# Altium PCB Interface_PCB.PcbDoc
Units mm, origin at the board's own origin, x right, y up, seen from the top; angles counter-clockwise.
Board outline 101.2 x 41.85 mm, 4 copper layers (Top Layer, Middle Layer 1, Middle Layer 2, Bottom Layer), stack 1.65 mm thick; 79 components, 48 nets, 304 pads, 9 vias.
Unrouted connection lines stored in the file: 76.
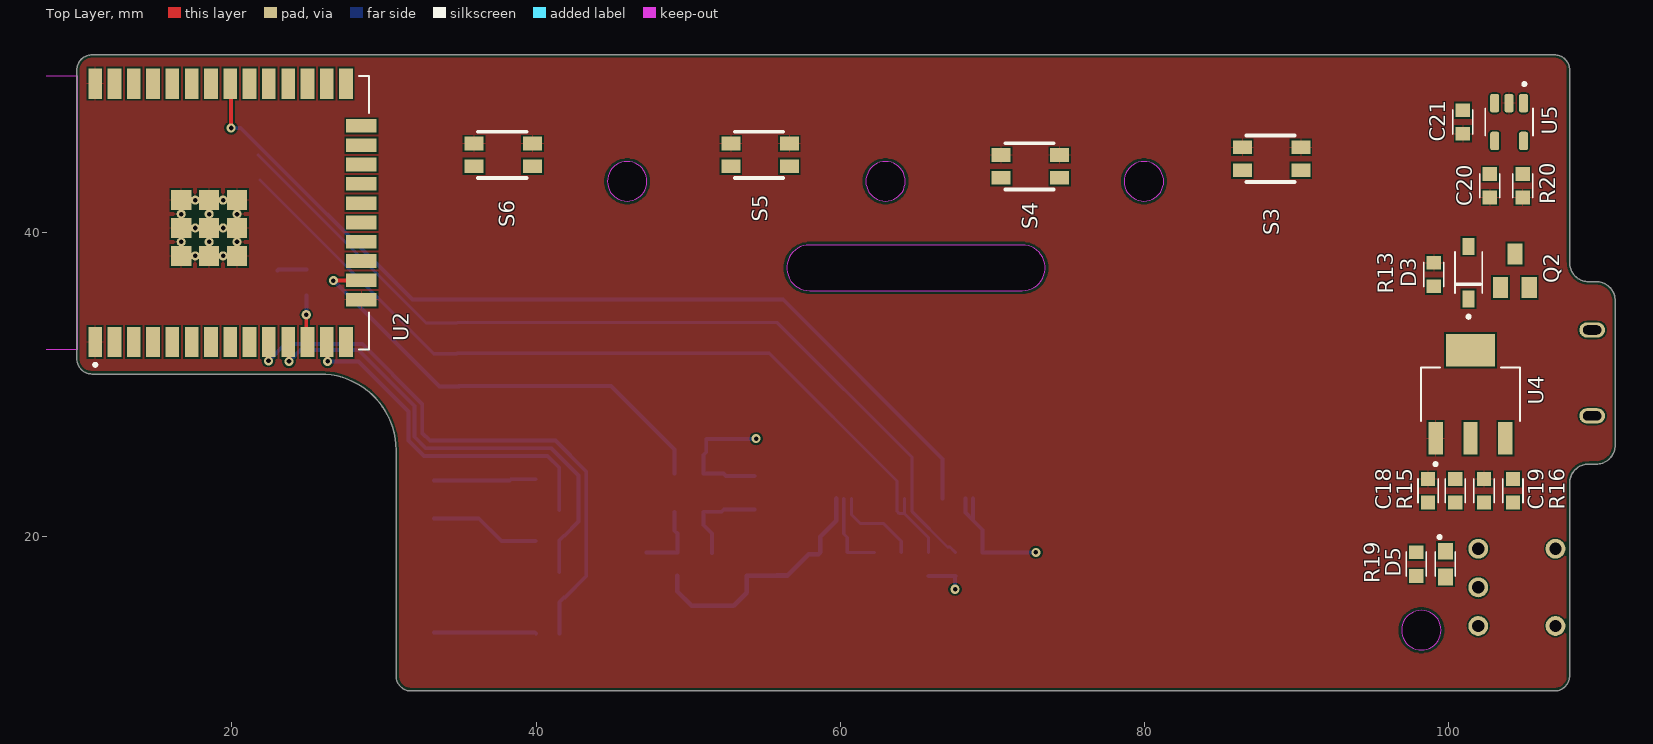
[diagram p0: Top Layer view]
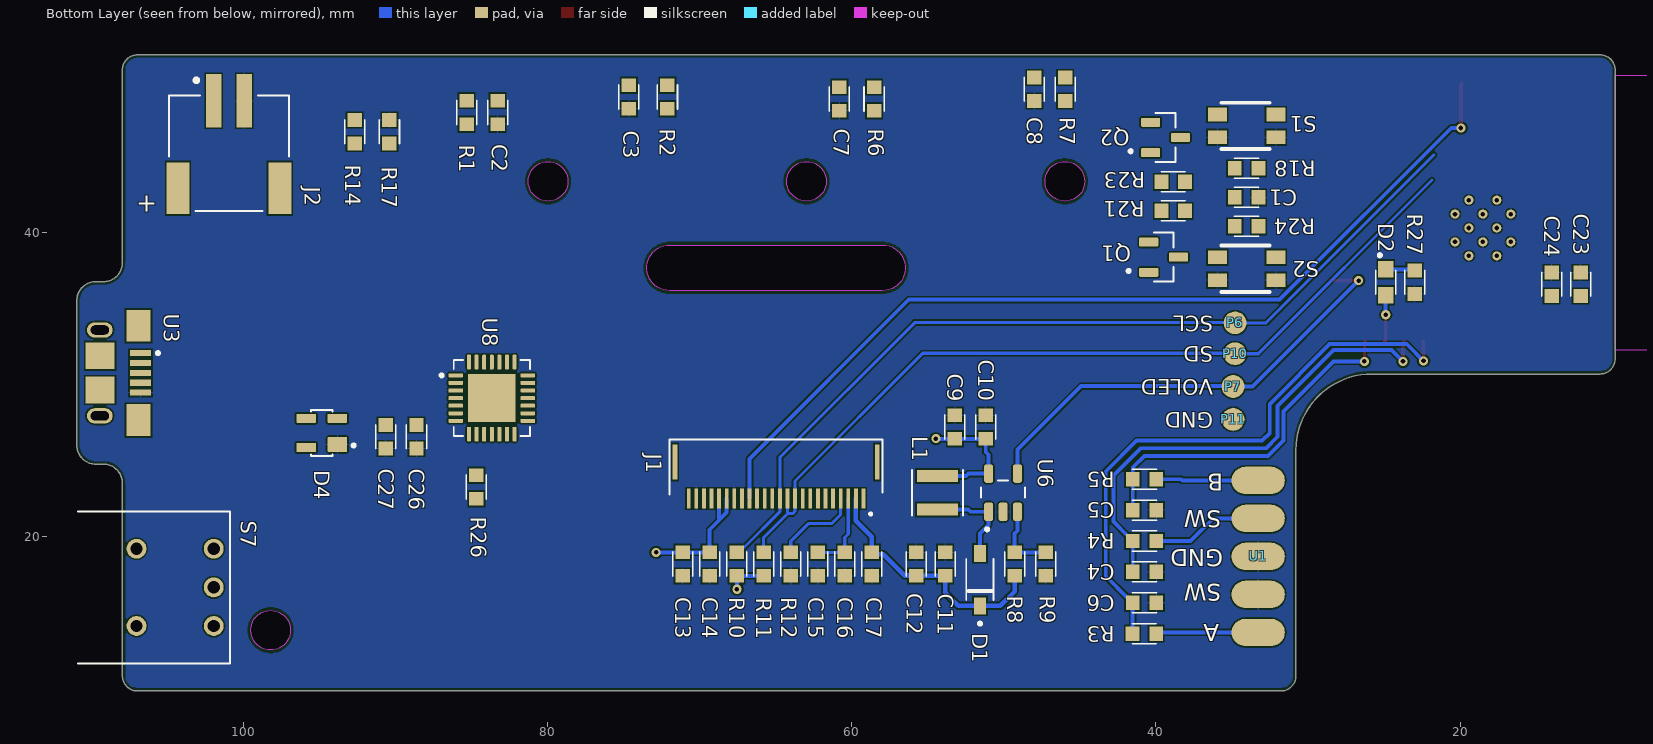
[diagram p1: Bottom Layer view, seen from below]
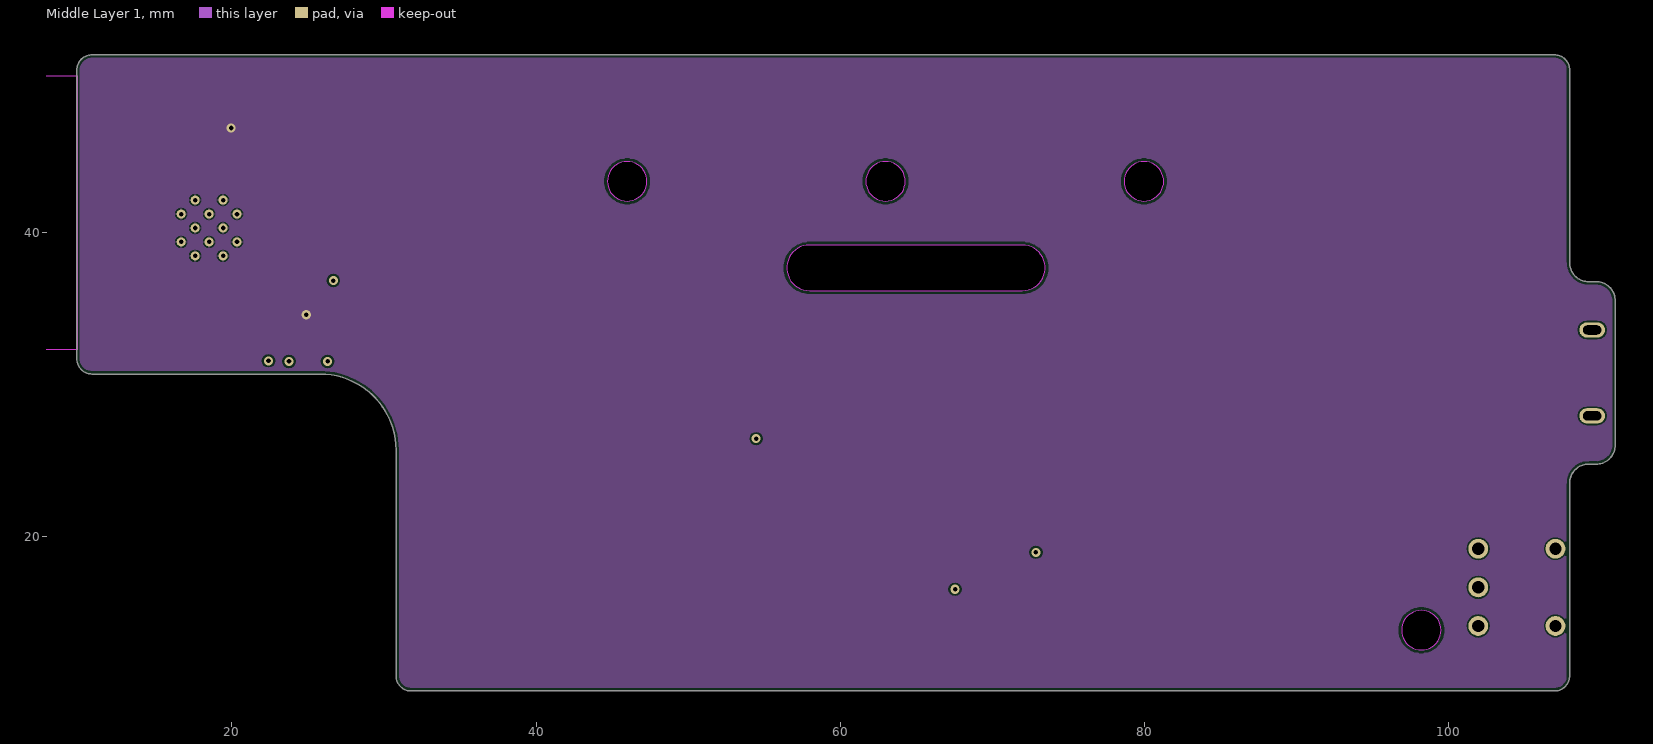
[diagram p2: Middle Layer 1]
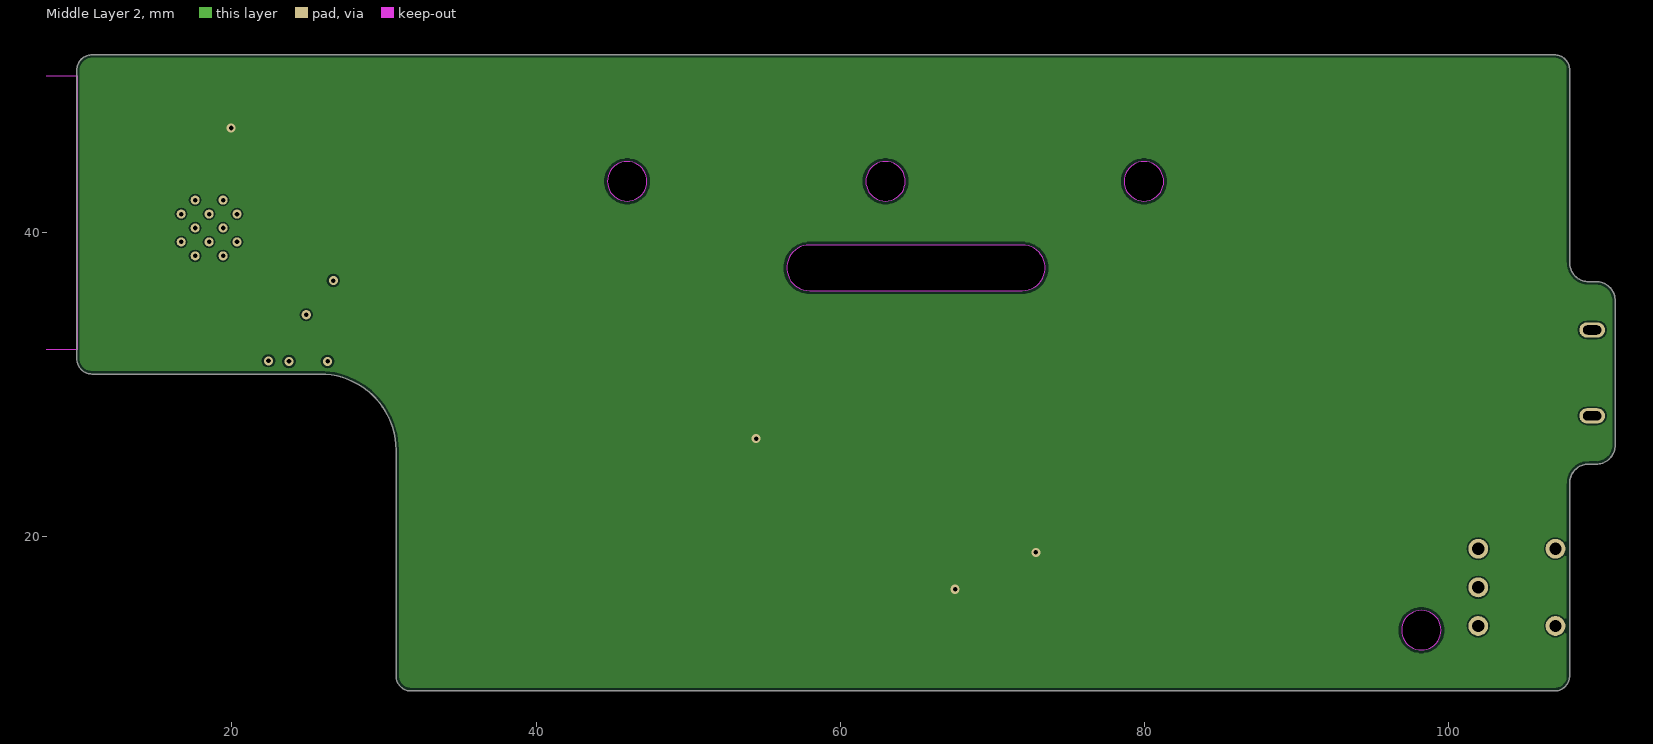
[diagram p3: Middle Layer 2]

## Layer stack, top to bottom
Top Solder: solder mask 0.0102, Solder Resist, Dk 3.5
Top Layer: signal copper 0.035
Dielectric 2: prepreg 0.1702, FR-4, Dk 4.5
Middle Layer 1: signal copper 0.0178
Dielectric 1: dielectric 1.2038, FR-4, Dk 4.8
Middle Layer 2: signal copper 0.0178
Dielectric 3: prepreg 0.1702, FR-4, Dk 4.5
Bottom Layer: signal copper 0.035
Bottom Solder: solder mask 0.0102, Solder Resist, Dk 3.5

## Board outline
25.792,30.667 cw(c25.792,25.667) 30.792,25.667 30.792,10.817 ccw(c31.792,10.817) 31.792,9.817 106.992,9.817 ccw(c106.992,10.817) 107.992,10.817 107.992,23.492 cw(c109.242,23.492) 109.242,24.742 109.742,24.742 ccw(c109.742,25.992) 110.992,25.992 110.992,35.492 ccw(c109.742,35.492) 109.742,36.742 109.242,36.742 cw(c109.242,37.992) 107.992,37.992 107.992,50.667 ccw(c106.992,50.667) 106.992,51.667 10.792,51.667 ccw(c10.792,50.667) 9.792,50.667 9.792,31.667 ccw(c10.792,31.667) 10.792,30.667
cut-out: 45.992,42.042 ccw(c45.992,43.342) 47.292,43.342 ccw(c45.992,43.342) 45.992,44.642 ccw(c45.992,43.342) 44.692,43.342 ccw(c45.992,43.342)
cut-out: 78.692,43.342 ccw(c79.992,43.342) 79.992,42.042 ccw(c79.992,43.342) 81.292,43.342 ccw(c79.992,43.342) 79.992,44.642 ccw(c79.992,43.342)
cut-out: 96.942,13.817 ccw(c98.242,13.817) 98.242,12.517 ccw(c98.242,13.817) 99.542,13.817 ccw(c98.242,13.817) 98.242,15.117 ccw(c98.242,13.817)
cut-out: 61.692,43.342 ccw(c62.992,43.342) 62.992,42.042 ccw(c62.992,43.342) 64.292,43.342 ccw(c62.992,43.342) 62.992,44.642 ccw(c62.992,43.342)
cut-out: 57.992,36.152 71.992,36.152 ccw(c71.992,37.652) 71.992,39.152 57.992,39.152 ccw(c57.992,37.652)

## Design rules (kind name [scope] priority, off if disabled: settings)
BoardOutlineClearance [All] p1: gap=0.2 ignorepadtopadclearanceinfootprint=FALSE
Clearance [All] p1: gap=0.102 ignorepadtopadclearanceinfootprint=FALSE except(0.127: Arc-Via Track-Via SMDPad-Via THPad-Via Via-Via Via-Fill Via-Poly Via-Region Via-Text; 0.25: Arc-Hole Track-Hole SMDPad-Hole THPad-Hole Via-Hole Fill-Hole Poly-Hole Region-Hole Text-Hole)
ComponentClearance [All] p1: gap=0.102 collisioncheckmode=3 verticalgap=0.102 showdistances=TRUE
DiffPairsRouting [All] p1: maxlimit=0.102 minlimit=0.102 mostfreqgap=0.102 toplayer_minwidth=0.102 toplayer_maxwidth=1816.048 toplayer_prefwidth=0.102 midlayer1_minwidth=0.102 midlayer1_maxwidth=1816.048 midlayer1_prefwidth=0.102 midlayer2_minwidth=0.102 midlayer2_maxwidth=1816.048 midlayer2_prefwidth=0.102 bottomlayer_minwidth=0.102 bottomlayer_maxwidth=1816.048 bottomlayer_prefwidth=0.102 maxuncoupledlength=12.7
Height [All] p1: minheight=0 maxheight=1816.048 prefheight=12.7
HoleSize [All] p1: absolutevalues=TRUE maxlimit=6.3 minlimit=0.2 maxpercent=80.000 minpercent=20.000
HoleToHoleClearance [All] p1: gap=0.25 allowstackedmicrovias=FALSE
MinimumAnnularRing [All] p1: minimumring=0.076
MinimumSolderMaskSliver [All] p1: minsoldermaskwidth=0
PlaneClearance [All] p1: clearance=0.102
PlaneConnect PlaneConnectPowerPads [InPadClass('PowerPads')] p1: planeconnectstyle=Direct reliefexpansion=0.508 reliefentries=4 reliefconductorwidth=0.254 reliefairgap=0.254
PlaneConnect [All] p2: pad.planeconnectstyle=Relief pad.reliefexpansion=0.3 pad.reliefentries=4 pad.reliefconductorwidth=0.102 pad.reliefairgap=0.102 via.planeconnectstyle=Direct via.reliefexpansion=0.3 via.reliefentries=4 via.reliefconductorwidth=0.127 via.reliefairgap=0.127
PolygonConnect PolygonConnectPowerPads [All vs (InPadClass('PowerPads'))] p1: connectstyle=Direct reliefconductorwidth=0.254 reliefentries=4 polygonreliefangle="90 Angle" airgapwidth=0.254
PolygonConnect [All] p2: thpad.connectstyle=Relief thpad.reliefconductorwidth=0.102 thpad.reliefentries=4 thpad.polygonreliefangle="90 Angle" thpad.airgapwidth=0.102 smdpad.connectstyle=Relief smdpad.reliefconductorwidth=0.102 smdpad.reliefentries=4 smdpad.polygonreliefangle="90 Angle" smdpad.airgapwidth=0.102 via.connectstyle=Direct via.reliefconductorwidth=0.127 via.reliefentries=4 via.polygonreliefangle="90 Angle" via.airgapwidth=0.127
RoutingVias [All] p1: holewidth=0.2 width=0.45 viastyle="Through Hole" minholewidth=0.2 minwidth=0.45 maxholewidth=6.3 maxwidth=6.55
SilkToSilkClearance [All] p1: silktosilkclearance=0
SilkToSolderMaskClearance [IsPad] p1: minsilkscreentomaskgap=0.102 clearancetoexposedcopper=TRUE
SolderMaskExpansion [All] p1: expansion=0.075 istentingtop=FALSE
Width [All] p1: maxlimit=1816.048 minlimit=0.102 preferedwidth=0.102
20 further rules are at their usual default settings.

## Classes and differential pairs
component class Power: C18 C19 C20 C21 D3 D5 J2 Q2 R13 R14 R15 R16 R17 R19 R20 S7 U4 U5
component class OLED: C9 C10 C11 C12 C13 C14 C15 C16 C17 D1 J1 L1 R8 R9 R10 R11 R12 U6
component class IO: C2 C3 C4 C5 C6 C7 C8 R1 R2 R3 R4 R5 R6 R7 S3 S4 S5 S6 U1
component class ESP32_Interface: C1 C23 C24 C26 C27 D2 D4 P6 P7 P10 P11 Q1 Q2 R18 R21 R23 R24 R26 R27 S1 S2 U2 U3 U8

## Components (designator, comment, footprint, x,y, rotation, side; value= is the part's Value field where it differs from the comment)
C1 "1nf" CHIP_0603 34.036,42.291 r180 bottom
C2 "0.1uF" CHIP_0603 83.312,47.879 r270 bottom
C3 "0.1uF" CHIP_0603 74.676,48.895 r270 bottom
C4 "0.1uF" CHIP_0603 40.754,17.653 r180 bottom
C5 "0.01uF" CHIP_0603 40.754,21.717 r180 bottom
C6 "00.1uF" CHIP_0603 40.754,15.621 r180 bottom
C7 "0.1uF" CHIP_0603 60.833,48.768 r270 bottom
C8 "0.1uF" CHIP_0603 48.006,49.403 r270 bottom
C9 "10uF" CHIP_0603 53.233,27.179 r90 bottom
C10 "1uF" CHIP_0603 51.201,27.179 r90 bottom
C11 "1uF 25V" CHIP_0603 53.868,18.162 r90 bottom
C12 "10uF 25V" CHIP_0603 55.773,18.162 r90 bottom
C13 "4.7uF" CHIP_0603 71.14,18.162 r270 bottom
C14 "0.1uF" CHIP_0603 69.362,18.162 r270 bottom
C15 "4.7uF" CHIP_0603 62.25,18.162 r270 bottom
C16 "0.1uF" CHIP_0603 60.472,18.162 r270 bottom
C17 "1uF" CHIP_0603 58.694,18.162 r270 bottom
C18 "22uF" CHIP_0603 98.679,22.987 r90 top
C19 "4.7uF" CHIP_0603 102.362,22.987 r90 top
C20 "4.7uF" CHIP_0603 102.743,43.053 r270 top
C21 "4.7uF" CHIP_0603 100.965,47.244 r270 top
C23 "0.1uF" CHIP_0603 12.065,36.576 r90 bottom
C24 "22uF" CHIP_0603 13.97,36.576 r90 bottom
C26 "0.1uF" CHIP_0603 88.646,26.543 r270 bottom
C27 "4.7Uf" CHIP_0603 90.678,26.543 r270 bottom
D1 "MBR130T1G" SOD-123-2 51.582,17.146 r90 bottom
D2 "Blue LED" "0603 LED Generic" 24.892,36.703 r270 bottom
D3 "MBR130T1G" SOD-123-2 101.346,37.338 r90 top
D4 "SP0503BAHTG" SP0503BAHTG 94.878,26.795 r90 bottom
D5 "Orange" "0603 LED Generic" 99.822,18.161 r270 top
J1 "0512812494" Top_Connector_Config_0512812494 64.992,22.48 r0 bottom locked
J2 "S2B-PH-SM4-TB(LF)(SN)" JST_S2B-PH-SM4-TB(LF)(SN) 100.981,48.641 r180 bottom
L1 "10uH" IND_LQH3NPZ100MMEL 54.376,22.861 r270 bottom
P6 "Test Point" "1 Solder Pad" 34.798,34.036 r180 bottom
P7 "Test Point" "1 Solder Pad" 34.925,29.845 r180 bottom
P10 "Test Point" "1 Solder Pad" 34.798,32.004 r90 bottom
P11 "Test Point" "1 Solder Pad" 34.925,27.686 r180 bottom
Q1 "SS8050-G" SS8050-G 39.497,38.354 r90 bottom
Q2 "CPH3356-TL-W" SOT23-3 104.394,37.465 r0 top
Q2 "SS8050-G" SS8050-G 39.37,46.228 r90 bottom
R1 "1K" CHIP_R_0603 85.344,47.879 r270 bottom
R2 "1K" CHIP_R_0603 72.136,48.895 r270 bottom
R3 "10K" CHIP_R_0603 40.767,13.589 r0 bottom
R4 "1K" CHIP_R_0603 40.754,19.685 r180 bottom
R5 "10K" CHIP_R_0603 40.754,23.749 r0 bottom
R6 "1K" CHIP_R_0603 58.547,48.768 r270 bottom
R7 "1K" CHIP_R_0603 45.974,49.403 r270 bottom
R8 "36K1%" CHIP_R_0603 49.296,18.162 r90 bottom
R9 "5.1K1%" CHIP_R_0603 47.264,18.162 r270 bottom
R10 "5K" CHIP_R_0603 67.584,18.162 r90 bottom
R11 "5K" CHIP_R_0603 65.806,18.162 r90 bottom
R12 "910K 1%" CHIP_R_0603 64.028,18.162 r270 bottom
R13 "100K" CHIP_R_0603 99.06,37.211 r90 top
R14 "100K" CHIP_R_0603 92.71,46.609 r270 bottom
R15 "1R" CHIP_R_0603 100.457,22.987 r270 top
R16 "1R" CHIP_R_0603 104.267,22.987 r270 top
R17 "100K" CHIP_R_0603 90.424,46.609 r90 bottom
R18 "10K" CHIP_R_0603 34.036,44.196 r0 bottom
R19 "1K" CHIP_R_0603 97.917,18.161 r90 top
R20 "2K" CHIP_R_0603 104.902,43.053 r270 top
R21 "10K" CHIP_R_0603 38.862,41.402 r180 bottom
R23 "10K" CHIP_R_0603 38.862,43.307 r180 bottom
R24 "10K" CHIP_R_0603 34.036,40.386 r0 bottom
R26 "2K" CHIP_R_0603 84.709,23.241 r270 bottom
R27 "1K" CHIP_R_0603 22.987,36.703 r270 bottom
S1 "TS-1185EC-C-D-B" TS-1185EC-C-D-B 34.036,46.99 r180 bottom
S2 "TS-1185EC-C-D-B" TS-1185EC-C-D-B 34.036,37.592 r180 bottom
S3 "Interface Button TBD" TS-1185EC-C-D-B 88.392,44.831 r0 top
S4 "Interface Button TBD" TS-1185EC-C-D-B 72.517,44.323 r0 top
S5 "Interface Button TBD" TS-1185EC-C-D-B 54.737,45.085 r0 top
S6 "Interface Button TBD" TS-1185EC-C-D-B 37.846,45.085 r0 top
S7 "AS11CH" AS11CH 104.521,16.637 r270 bottom
U1 "Encoder" "Encoder Solder Pads" 33.274,18.669 r0 bottom
U2 "ESP32-WROOM-32E_(16MB)" MODULE_ESP32-WROOM-32E 16.256,41.275 r90 top locked
U3 "Micro_USB" U254-051T-4BH83-F1S 106.807,30.742 r270 bottom locked
U4 "LMS8117AMP-3.3/NOPB" SOT230P700X180-4N 101.473,29.337 r90 top
U5 "MCP73831T-2ATI/OT" SOT95P280X145-5N 104.013,47.244 r270 top
U6 "AP3012KTR-G1" SOT-23 50.058,22.861 r90 bottom
U8 "CP2102-GM" QFN50P500X500X100-29N 83.693,29.083 r180 bottom

## Footprints (in the part's own frame and the unit in brackets; to place one, negate y for a bottom-side part, rotate by r counter-clockwise, add the part's x,y. Pads: shape width x height; smd on the part's side, far side on the other; paste and mask are expansions set on the pad)
"1 Solder Pad" [mm]
  round 1.5 smd: 1(0,0)
"0603 LED Generic" [mm]
  rect 1.1x1 smd: 1(-0.85,0) 2(0.85,0)
  silkscreen extent -1.88,-0.66 0.8,0.66, body extent -0.8,-0.4 0.8,0.4, height 0.4
AS11CH [mm]
  round 1.308 hole 0.8: 1(-2.54,2.54) 2(0,2.54) 3(2.54,2.54) M1(-2.54,-2.54) M2(2.54,-2.54)
  silkscreen extent -5,-6.4 5,3.6, body extent -4.9,-11.18 4.9,2.82, height 6.18
CHIP_0603 [mm] "Chip Capacitor, 2-Leads, Body 1.60x0.80mm, IPC Medium Density"
  rect 0.9x0.95 smd: 1(-0.775,0) 2(0.775,0)
  silkscreen extent -0.8,-0.66 0.8,0.66, body extent -0.75,-0.4 0.75,0.4, height 0.65
CHIP_R_0603 [mm] "Chip Resistor, 2-Leads, Body 1.60x0.80mm, IPC Medium Density"
  rect 0.9x0.95 smd: 1(-0.775,0) 2(0.775,0)
  silkscreen extent -0.8,-0.66 0.8,0.66, body extent -0.75,-0.4 0.75,0.4, height 0.63
"Encoder Solder Pads" [mm]
  oval 3.5x1.8 smd: 1(0,5) 2(0,2.5) 3(0,0) 4(0,-2.5) 5(0,-5)
IND_LQH3NPZ100MMEL [mm]
  rect 0.8x2.7 smd: 1(-1.1,0) 2(1.1,0)
  silkscreen extent -1.5,-1.67 1.5,1.67, body extent -1.5,-1.5 1.5,1.5, height 1.5
JST_S2B-PH-SM4-TB(LF)(SN) [mm]
  rect 1x3.5 smd: 1(-1,0) 2(1,0)
  rect 1.5x3.4 smd: S1(-3.35,-5.75) S2(3.35,-5.75)
  silkscreen extent -3.95,-7.25 3.95,1.45, body extent -3.95,-7.3 3.95,1.3, height 5.65
MODULE_ESP32-WROOM-32E [mm]
  rect 2x0.9 smd: 1(-8.5,5.26) 2(-8.5,3.99) 3(-8.5,2.72) 4(-8.5,1.45) 5(-8.5,0.18) 6(-8.5,-1.09) 7(-8.5,-2.36) 8(-8.5,-3.63) 9(-8.5,-4.9) 10(-8.5,-6.17) 11(-8.5,-7.44) 12(-8.5,-8.71) 13(-8.5,-9.98) 14(-8.5,-11.25) 25(8.5,-11.25) 26(8.5,-9.98) 27(8.5,-8.71) 28(8.5,-7.44) 29(8.5,-6.17) 30(8.5,-4.9) 31(8.5,-3.63) 32(8.5,-2.36) 33(8.5,-1.09) 34(8.5,0.18) 35(8.5,1.45) 36(8.5,2.72) 37(8.5,3.99) 38(8.5,5.26)
  rect 0.9x2 smd: 15(-5.715,-12.25) 16(-4.445,-12.25) 17(-3.175,-12.25) 18(-1.905,-12.25) 19(-0.635,-12.25) 20(0.635,-12.25) 21(1.905,-12.25) 22(3.175,-12.25) 23(4.445,-12.25) 24(5.715,-12.25)
  rect 1.33x1.33 smd: 39(-2.835,-2.24) 39(-2.835,-0.405) 39(-2.835,-4.075) 39(-1,-0.405) 39(-1,-4.075) 39(-1,-2.24) 39(0.835,-0.405) 39(0.835,-4.075) 39(0.835,-2.24)
  round 0.6 hole 0.3: 39(-2.835,-1.322) 39(-2.835,-3.157) 39(-1.917,-2.24) 39(-1.917,-0.405) 39(-1.917,-4.075) 39(-1,-1.322) 39(-1,-3.157) 39(-0.082,-0.405) 39(-0.082,-2.24) 39(-0.082,-4.075) 39(0.835,-1.322) 39(0.835,-3.157)
  Keep-Out Layer region: 9,6.45 -9,6.45 -9,12.75 9,12.75
  Keep-Out Layer region: 9,6.45 -9,6.45 -9,12.75 9,12.75
  silkscreen extent -10.1,-12.75 9,5.35, body extent -9,-12.75 9,12.75, height 3.2
QFN50P500X500X100-29N [mm]
  rrect50% 0.97x0.26 smd: 1(-2.37,1.5) 2(-2.37,1) 3(-2.37,0.5) 4(-2.37,0) 5(-2.37,-0.5) 6(-2.37,-1) 7(-2.37,-1.5) 15(2.37,-1.5) 16(2.37,-1) 17(2.37,-0.5) 18(2.37,0) 19(2.37,0.5) 20(2.37,1) 21(2.37,1.5)
  rrect50% 0.26x0.97 smd: 8(-1.5,-2.37) 9(-1,-2.37) 10(-0.5,-2.37) 11(0,-2.37) 12(0.5,-2.37) 13(1,-2.37) 14(1.5,-2.37) 22(1.5,2.37) 23(1,2.37) 24(0.5,2.37) 25(0,2.37) 26(-0.5,2.37) 27(-1,2.37) 28(-1.5,2.37)
  rect 3.15x3.15 smd paste-3: 29(0,0)
  silkscreen extent -3.4,-2.5 2.5,2.5, body extent -2.5,-2.5 2.5,2.5, height 1
SOD-123-2 [mm]
  rect 1.12x0.8 smd: A(1.73,0) C(-1.73,0)
  silkscreen extent -3,-0.9 1.35,0.9, body extent -1.84,-0.8 1.84,0.8, height 1.35
SOT23-3 [mm]
  rect 1x1.4 smd: 1(-0.95,-1.1) 2(0.95,-1.1) 3(0,1.1)
  body extent -1.5,-1.25 1.5,1.25, height 1.1
SOT95P280X145-5N [mm]
  rrect50% 1.22x0.6 smd: 1(-1.245,0.95) 2(-1.245,0) 3(-1.245,-0.95) 4(1.245,-0.95) 5(1.245,0.95)
  silkscreen extent -2.6,-1.57 0.88,1.57, body extent -1.35,-1.45 1.35,1.45, height 1.45
SOT230P700X180-4N [mm]
  rect 2.15x0.95 smd: 1(-2.9,2.3) 2(-2.9,0) 3(-2.9,-2.3)
  rect 2.15x3.25 smd: 4(2.9,0)
  silkscreen extent -4.7,-3.25 1.75,3.25, body extent -3.5,-3.25 3.5,3.25, height 1.8
SOT-23 [mm]
  rrect50% 1.21x0.59 smd: 1(-1.255,0.95) 2(-1.255,0) 3(-1.255,-0.95) 4(1.255,-0.95) 5(1.255,0.95)
  silkscreen extent -2.51,-1.45 0.8,1.45, body extent -1.4,-1.45 1.4,1.45, height 1.45
SP0503BAHTG [mm]
  rrect15% 0.99x1.3 smd: 1(-0.76,-1.025)
  rrect15% 0.59x1.3 smd: 2(0.96,-1.025) 3(0.96,1.025) 4(-0.96,1.025)
  silkscreen extent -1.52,-2.2 1.52,0.7, body extent -1.46,-1.18 1.46,1.18, height 1.22
SS8050-G [mm]
  rrect25% 0.59x1.26 smd: 1(1,0.98) 2(-1,0.98) 3(0,-0.98)
  silkscreen extent -1.61,-0.65 1.61,2.4, body extent -1.45,-1.15 1.45,1.15, height 1.1
Top_Connector_Config_0512812494 [mm] "24 Position FFC, FPC Connector Contacts, Top and Bottom 0.020\" (0.50mm) Surface Mount, Right Angle"
  rect 0.25x1.3 smd: 1(5.75,0) 2(5.25,0) 3(4.75,0) 4(4.25,0) 5(3.75,0) 6(3.25,0) 7(2.75,0) 8(2.25,0) 9(1.75,0) 10(1.25,0) 11(0.75,0) 12(0.25,0) 13(-0.25,0) 14(-0.75,0) 15(-1.25,0) 16(-1.75,0) 17(-2.25,0) 18(-2.75,0) 19(-3.25,0) 20(-3.75,0) 21(-4.25,0) 22(-4.75,0) 23(-5.25,0) 24(-5.75,0)
  rect 0.3x2.3 smd: S1(-6.65,-2.4) S2(6.65,-2.4)
  silkscreen extent -7,-3.89 7,1.08, body extent -7.05,-3.95 7.05,0.1, height 1.2
TS-1185EC-C-D-B [mm]
  rect 1.25x0.9 smd: 1(-1.925,0.75) 2(1.925,0.75) 3(1.925,-0.75) 4(-1.925,-0.75)
  silkscreen extent -1.65,-1.52 1.52,1.52, body extent -2.33,-1.5 2.32,1.5, height 2
U254-051T-4BH83-F1S [mm]
  rect 0.4x1.4 smd: 1(-1.3,0) 2(-0.65,0) 3(0,0) 4(0.65,0) 5(1.3,0)
  rect 2.1x1.6 smd: S1(-3.1,-0.125) S2(3.1,-0.125)
  rect 1.75x1.9 smd: S3(-1.125,-2.65) S4(1.125,-2.65)
  oval 1x1.7 hole 0.6 slot 1.2 at 90 deg: S5(-2.825,-2.67) S6(2.825,-2.67)
  silkscreen extent -1.4,1.05 -1.2,1.25, body extent -3.9,-5.31 3.9,0.24, height 2.7

## Part data
C1 C2 C3 C4 C5 C6 C7 C8 C9 C10 C11 C12 C13 C14 C15 C16 C17 C18 C19 C20 C21 C23 C24 C26 C27: library part "0603 Ceramic Capacitor", "Generic 0603 Ceramic Capacitor", Package="1005 Yageo", DigiKey-Purchase-URL=https://snapeda.com/shop?store=DigiKey&id=940461, MF=Yageo, Mouser-Purchase-URL=https://snapeda.com/shop?store=Mouser&id=940461, MP=AC0402FR-071ML, SnapEDA_Link=https://www.snapeda.com/parts/AC0402FR-071ML/Yageo/view-part/940461/?ref=snap
D1 D3: "Diode Schottky 30 V 1A Surface Mount SOD-123", Package="SOD-123 Diodes Inc.", Arrow_Electronics-Purchase-URL=https://snapeda.com/shop?store=Arrow+Electronics&id=2580921, Availability=Good, DigiKey-Purchase-URL=https://snapeda.com/shop?store=DigiKey&id=2580921, MF="ON Semiconductor", Mouser-Purchase-URL=https://snapeda.com/shop?store=Mouser&id=2580921, MP=MBR0530, Price=None, SnapEDA_Link=https://www.snapeda.com/parts/MBR0530/ON%20Semiconductor/view-part/2580921/?ref=snap
D2 D5: library part "0603 Generic LED", "0603 Generic LED"
D4: "8.5V Clamp Ipp Tvs Diode Surface Mount SOT-143-4", Package="SOT-143 Littelfuse", Digi-Key_Part_Number=F2715CT-ND, Digi-Key_Purchase_URL=https://www.digikey.com/product-detail/en/littelfuse-inc/SP0503BAHTG/F2715CT-ND/1154322?utm_source=snapeda&utm_medium=aggregator&utm_campaign=symbol, MF="Littelfuse Inc.", MP=SP0503BAHTG, SnapEDA_Link=https://www.snapeda.com/parts/SP0503BAHTG/Littelfuse%20Inc./view-part/214427/?ref=snap
J1: "24 Position FFC, FPC Connector Contacts, Top and Bottom 0.020\" (0.50mm) Surface Mount, Right Angle", Package=None, Availability=Unavailable, EU_RoHS_Compliance=Compliant, MF="TE Connectivity", MP=2-84952-4, Price=None, SnapEDA_Link=https://www.snapeda.com/parts/2-84952-4/TE%20Connectivity/view-part/1466414/?ref=snap
J2: "Connector Header Surface Mount, Right Angle 2 position 0.079 _2.00mm_", Package=None, Digi-Key_Part_Number=455-1749-1-ND, Digi-Key_Purchase_URL=https://www.digikey.com.au/product-detail/en/jst-sales-america-inc/S2B-PH-SM4-TB_LF__SN_/455-1749-1-ND/926846?utm_source=snapeda&utm_medium=aggregator&utm_campaign=symbol, MF="JST Sales", MP=S2B-PH-SM4-TB_LF__SN_, SnapEDA_Link=https://www.snapeda.com/parts/S2B-PH-SM4-TB%28LF%29%28SN%29/JST%20Sales%20America%20Inc./view-part/46879/?ref=snap
L1: library part LQH3NPZ100MMEL, "Inductor with Inductance: 10uH Tol. +/-20%, Package: 1212 _3030_", Package="1212 Murata", Digi-Key_Part_Number=490-15968-1-ND, Digi-Key_Purchase_URL=https://www.digikey.com/product-detail/en/murata-electronics/LQH3NPZ100MMEL/490-15968-1-ND/6800633?utm_source=snapeda&utm_medium=aggregator&utm_campaign=symbol, MF=Murata, MP=LQH3NPZ100MMEL, SnapEDA_Link=https://www.snapeda.com/parts/LQH3NPZ100MMEL/Murata/view-part/4547346/?ref=snap
P6 P7 P10 P11: library part "Single Test Point"
Q1 Q2: "NPN TRANSISTOR 1.5A 40V SOT-23 R"
Q2: "P-Channel 20 V 2.5A (Ta) 1W (Ta) Surface Mount 3-CPH"
R1 R2 R3 R4 R5 R6 R7 R8 R9 R10 R11 R12 R13 R14 R15 R16 R17 R18 R19 R20 R21 R23 R24 R26 R27: library part "0603 Generic Resistor", "Generic 0603 Resistor"
S1 S2: "SMD Tactile Switche - 3mm 2mm 50mA 3.65mm SPST 12V"
S3 S4 S5 S6: "TBD"
S7: "SWITCH SLIDE SPST 0.4VA 28V"
U1: "Encoder solder connections for PEC11R-4215F-S0024", Package="SOT-23-5 Diodes Inc.", Availability=Unavailable, MF="Diodes Inc.", MP=AP3012KTR-G1, Price=None, SnapEDA_Link=https://www.snapeda.com/parts/AP3012KTR-G1/Diodes%20Inc./view-part/587030/?ref=snap
U2: "Bluetooth, WiFi 802.11b/g/n, Bluetooth v4.2 +EDR, Class 1, 2 and 3 Transceiver Module 2.4GHz ~ 2.5GHz Integrated, Trace Surface Mount", Package=None, Availability=Unavailable, Check_prices=https://www.snapeda.com/parts/ESP32-WROOM-32E%20(16MB)/Espressif%20Systems/view-part/4792564/?ref=eda, MF="Espressif Systems", MP="ESP32-WROOM-32E (16MB)", Price=None, SnapEDA_Link=https://www.snapeda.com/parts/ESP32-WROOM-32E%20(16MB)/Espressif%20Systems/view-part/4792564/?ref=snap
U3: "XKB Connectivity U254-051T-4BH83-F1S"
U4: "Fixed 3.3V LDO 1A 15V input SOT-223", Package="SOT-223-4 Texas Instruments", Availability=Warning, Check_prices=https://www.snapeda.com/parts/LMS8117AMP-3.3/NOPB/Texas%20Instruments/view-part/104396/?ref=eda, MF="Texas Instruments", MP=LMS8117AMP-3.3/NOPB, Price=None, Purchase-URL=https://pricing.snapeda.com/search/part/LMS8117AMP-3.3/NOPB/?ref=eda, SnapEDA_Link=https://www.snapeda.com/parts/LMS8117AMP-3.3/NOPB/Texas%20Instruments/view-part/104396/?ref=snap
U5: "Charger IC Lithium Ion/Polymer SOT-23-5", Package="SOT-23 Microchip", Arrow_Americas-Purchase-URL=https://snapeda.com/shop?store=Arrow+Americas&id=51423, Availability=Unavailable, DigiKey-Purchase-URL=https://snapeda.com/shop?store=DigiKey&id=51423, MF=Microchip, Mouser-Purchase-URL=https://snapeda.com/shop?store=Mouser&id=51423, MP=MCP73831T-2ATI/OT, Price=None, SnapEDA_Link=https://www.snapeda.com/parts/MCP73831T-2ATI/OT/Microchip/view-part/51423/?ref=snap
U6: "Boost Switching Regulator IC Positive Adjustable 1.25V 1 Output 500mA _Switch_ SC-74A, SOT-753", Package="SOT-23-5 Diodes Inc.", Availability=Unavailable, MF="Diodes Inc.", MP=AP3012KTR-G1, Price=None, SnapEDA_Link=https://www.snapeda.com/parts/AP3012KTR-G1/Diodes%20Inc./view-part/587030/?ref=snap
U8: "USB Bridge, USB to UART USB 2.0 UART Interface 28-QFN _5x5_", Package="QFN-28 Silicon Labs", Availability=Unavailable, MF="Silicon Labs", MP=CP2102-GM, Price=None, SnapEDA_Link=https://www.snapeda.com/parts/CP2102-GM/Silicon%20Labs/view-part/135876/?ref=snap

## Via types
v1: diameter 0.6, hole 0.3, Top Layer to Bottom Layer, 9 vias

## Nets (pads, with @x,y where several pads share a name; then routed paths per layer and width w, separated by ;. In a path a pad name is that pad's centre, name@x,y a point inside that pad or via, vN(x,y) a via of type N, cw(c..) or ccw(c..) an arc to the next point about the centre after c; other vN are vias at no path point)
3V3: C9.1 C10.1 C13.1 C14.1 C23.1 C24.1 C26.1 C27.1 J1.5 J1.6 L1.1 R10.1 R11.1 R15.1 R18.1 R24.1 R26.2 U2.2 U4.2 U4.4 U6.5 U8.6 U8.7 | length 20.7
  Bottom Layer w0.254: L1.1 52.493,23.961 52.338,24.116 U6.5 51.008,25.354 51.201,25.547 C10.1 C9.1 v1@54.471,26.404 ; R11.1 R10.1 67.564,17.368 v1(67.564,16.51) ; J1.6 68.242,21.547 68.742,21.047 ; J1.5 68.742,21.047 ; v1(72.884,18.937) C13.1 C14.1 69.362,20.427 68.742,21.047
  other v1: 54.483,26.416
DTR: Q1.2 R21.2 U8.28
EN: C1.1 Q2.3@38.39,46.228 R18.2 S1.1 S1.2 U2.3
GND: C1.2 C2.2 C3.2 C4.2 C5.2 C6.2 C7.2 C8.2 C9.2 C10.2 C11.2 C12.2 C13.2 C14.2 C15.2 C16.2 C17.2 C18.2 C19.2 C20.2 C21.2 C23.2 C24.2 C26.2 C27.2 D4.1 J1.2 J1.3 J1.7 J1.8 J1.10 J1.11 J1.12 J2.2 P11.1 R9.2 R12.2 R13.2 R17.2 R20.2 R27.2 S1.3 S1.4 S2.3 S2.4 S3.1 S3.2 S4.1 S4.2 S5.1 S5.2 S6.1 S6.2 U1.2 U1.3 U2.1 U2.15 U2.38 U2.39 U3.5 U4.1 U5.2 U6.2 U8.3 U8.29
IO0: Q1.3 R24.2 S2.1 S2.2 U2.25
NetC2_1: C2.1 R1.1 U2.37
NetC3_1: C3.1 R2.1 U2.23
NetC4_1: C4.1 R4.1 U2.11 | length 32.2
  Top Layer w0.254: U2.11 23.749,32.722 v1(23.749,31.496)
  Bottom Layer w0.254: v1(23.749,31.496) 24.511,32.258 28.321,32.258 32.004,28.575 32.004,26.543 32.766,25.781 41.021,25.781 42.799,24.003 42.799,20.955 41.877,20.033 41.852,20.033 41.529,19.71 R4.1 C4.1
NetC5_1: C5.1 R5.2 U2.13 | length 23.3
  Top Layer w0.254: U2.13 26.289,32.722 v1(26.289,31.496)
  Bottom Layer w0.254: v1(26.289,31.496) 28.321,31.496 31.623,28.194 31.623,26.289 32.639,25.273 40.767,25.273 41.529,24.511 R5.2 C5.1
NetC6_1: C6.1 R3.2 U2.10 | length 38.6
  Top Layer w0.254: v1@22.399,31.543 22.399,32.748 U2.10
  Bottom Layer w0.254: v1(22.402,31.533) 23.508,32.639 28.575,32.639 32.512,28.702 32.512,26.797 33.02,26.289 41.275,26.289 43.307,24.257 43.307,17.373 41.903,15.969 41.852,15.969 41.542,15.659 R3.2
NetC7_1: C7.1 R6.1 U2.27
NetC8_1: C8.1 R7.1 U2.28
NetC15_1: C15.1 C16.1 J1.22 | length 5.4
  Bottom Layer w0.203: J1.22 60.242,20.149 60.472,19.919 C16.1 C15.1
NetC18_1: C18.1 R15.2
NetC19_1: C19.1 R16.2
NetD1_A: D1.A L1.2 U6.1 | length 6.4
  Bottom Layer w0.254: D1.A 51.582,20.173 51.008,20.747 U6.1 52.213,21.606 52.368,21.761 L1.2
NetD2_1: D2.1 R27.1 | length 1.9
  Bottom Layer w0.254: R27.1 23.062,37.553 D2.1
NetD2_2: D2.2 U2.12 | length 3.1
  Top Layer w0.254: v1(24.889,34.566) 24.889,32.852 U2.12
  Bottom Layer w0.254: v1@24.892,34.544 D2.2
NetD3_C: D3.C Q2.2@105.344,36.365 S7.1
NetD5_1: D5.1 U5.1
NetD5_2: D5.2 R19.2
NetJ1_9: J1.9 U2.31 | length 61.4
  Top Layer w0.254: U2.31 19.942,49.719 v1(19.942,46.853)
  Bottom Layer w0.254: v1(19.942,46.853) 20.564,46.853 20.574,46.863 31.877,35.56 56.261,35.56 66.742,25.079 J1.9
NetJ1_13: J1.13 P6.1 R10.2 U2.36 | length 58.8
  Bottom Layer w0.203: 21.717,45.085 32.766,34.036 P6.1 ; P6.1@34.798,34.066 55.88,34.066 55.88,34.036 64.742,25.174 J1.13 64.742,21.618 67.074,19.286 67.235,19.286 R10.2
NetJ1_14: J1.14 J1.15 P10.1 R11.2 U2.33 | length 56.9
  Bottom Layer w0.203: 21.844,43.434 33.274,32.004 P10.1 ; P10.1@34.798,32.034 55.372,32.034 55.372,32.004 63.742,23.634 J1.15 63.742,21.643 63.901,21.483 64.242,21.483 ; J1.14 64.242,21.483 ; R11.2 65.806,19.919 64.242,21.483
NetJ1_21: J1.21 R12.1 | length 5.8
  Bottom Layer w0.203: J1.21 60.742,21.427 61.341,20.828 62.865,20.828 64.028,19.665 R12.1
NetP7_1: P7.1 U2.16 U6.4 | length 30.5
  Top Layer w0.254: v1(26.67,36.818) 28.494,36.818 U2.16
  Bottom Layer w0.254: v1(26.67,36.818) 33.643,29.845 P7.1 ; P7.1@34.925,29.875 44.928,29.875 49.108,25.695 U6.4
NetQ1_1: Q1.1 R23.1
NetQ2_1: Q2.1@40.35,47.228 R21.1
NetR1_2: R1.2 S3.3 S3.4
NetR2_2: R2.2 S4.3 S4.4
NetR3_1: R3.1 U1.1 | length 6.8
  Bottom Layer w0.254: U1.1 39.912,13.669 R3.1
NetR4_2: R4.2 U1.4 | length 7.3
  Bottom Layer w0.254: U1.4 36.235,21.169 37.719,19.685 R4.2
NetR5_1: R5.1 U1.5 | length 6.7
  Bottom Layer w0.254: U1.5 38.274,23.669 38.354,23.749 R5.1
NetR6_2: R6.2 S5.3 S5.4
NetR7_2: R7.2 S6.3 S6.4
NetR8_2: R8.2 R9.1 U6.3 | length 4.8
  Bottom Layer w0.254: R9.1 R8.2 49.296,20.173 49.108,20.361 U6.3
NetR14_2: R14.2 R17.1
NetR20_1: R20.1 U5.5
NetR26_1: R26.1 U8.9
REG_IN: R16.1 S7.3 U4.3
RTS: Q2.2@40.35,45.228 R23.2 U8.24
RXD: U2.34 U8.26
TXD: U2.35 U8.25
USB_DM: D4.3 U3.2 U8.5
USB_DP: D4.4 U3.3 U8.4
V_BATT: C21.1 J2.1 Q2.3@104.394,38.565 R14.1 U5.3
V_USB: C20.1 D3.A D4.2 Q2.1@103.444,36.365 R13.1 R19.1 U3.1 U5.4 U8.8
VOLED: C11.1 C12.1 C17.1 D1.C J1.23 R8.1 | length 16.9
  Bottom Layer w0.305: R8.1 49.296,16.363 50.243,15.416 D1.C 53.008,15.416 53.868,16.276 C11.1 C12.1 55.796,17.41 56.526,17.41 57.94,18.824 58.58,18.824 C17.1 58.694,19.959 59.742,21.007 J1.23
pads on no net: J1.1 J1.4 J1.16 J1.17 J1.18 J1.19 J1.20 J1.24 J1.S1 J1.S2 J2.S1 J2.S2 S7.2 S7.M1 S7.M2 U2.4 U2.5 U2.6 U2.7 U2.8 U2.9 U2.14 U2.17 U2.18 U2.19 U2.20 U2.21 U2.22 U2.24 U2.26 U2.29 U2.30 U2.32 U3.4 U3.S1 U3.S2 U3.S3 U3.S4 U3.S5 U3.S6 U8.1 U8.2 U8.10 U8.11 U8.12 U8.13 U8.14 U8.15 U8.16 U8.17 U8.18 U8.19 U8.20 U8.21 U8.22 U8.23 U8.27

## Polygon pours and split planes (outlines as drawn)
GND on Top Layer "GND_L01_P000" (solid, pour order 0): 25.792,30.667 cw(c25.792,25.667) 30.792,25.667 30.792,10.817 ccw(c31.792,10.817) 31.792,9.817 106.992,9.817 ccw(c106.992,10.817) 107.992,10.817 107.992,23.492 cw(c109.242,23.492) 109.242,24.742 109.742,24.742 ccw(c109.742,25.992) 110.992,25.992 110.992,35.492 ccw(c109.742,35.492) 109.742,36.742 109.242,36.742 cw(c109.242,37.992) 107.992,37.992 107.992,50.667 ccw(c106.992,50.667) 106.992,51.667 10.792,51.667 ccw(c10.792,50.667) 9.792,50.667 9.792,31.667 ccw(c10.792,31.667) 10.792,30.667
GND on Bottom Layer "GND_L04_P001" (solid, pour order 1): 25.792,30.667 cw(c25.792,25.667) 30.792,25.667 30.792,10.817 ccw(c31.792,10.817) 31.792,9.817 106.992,9.817 ccw(c106.992,10.817) 107.992,10.817 107.992,23.492 cw(c109.242,23.492) 109.242,24.742 109.742,24.742 ccw(c109.742,25.992) 110.992,25.992 110.992,35.492 ccw(c109.742,35.492) 109.742,36.742 109.242,36.742 cw(c109.242,37.992) 107.992,37.992 107.992,50.667 ccw(c106.992,50.667) 106.992,51.667 10.792,51.667 ccw(c10.792,50.667) 9.792,50.667 9.792,31.667 ccw(c10.792,31.667) 10.792,30.667
GND on Middle Layer 1 "GND_L02_P002" (solid, pour order 2): 25.792,30.667 cw(c25.792,25.667) 30.792,25.667 30.792,10.817 ccw(c31.792,10.817) 31.792,9.817 106.992,9.817 ccw(c106.992,10.817) 107.992,10.817 107.992,23.492 cw(c109.242,23.492) 109.242,24.742 109.742,24.742 ccw(c109.742,25.992) 110.992,25.992 110.992,35.492 ccw(c109.742,35.492) 109.742,36.742 109.242,36.742 cw(c109.242,37.992) 107.992,37.992 107.992,50.667 ccw(c106.992,50.667) 106.992,51.667 10.792,51.667 ccw(c10.792,50.667) 9.792,50.667 9.792,31.667 ccw(c10.792,31.667) 10.792,30.667
3V3 on Middle Layer 2 "3V3_L03_P003" (solid, pour order 3): 25.792,30.667 cw(c25.792,25.667) 30.792,25.667 30.792,10.817 ccw(c31.792,10.817) 31.792,9.817 106.992,9.817 ccw(c106.992,10.817) 107.992,10.817 107.992,23.492 cw(c109.242,23.492) 109.242,24.742 109.742,24.742 ccw(c109.742,25.992) 110.992,25.992 110.992,35.492 ccw(c109.742,35.492) 109.742,36.742 109.242,36.742 cw(c109.242,37.992) 107.992,37.992 107.992,50.667 ccw(c106.992,50.667) 106.992,51.667 10.792,51.667 ccw(c10.792,50.667) 9.792,50.667 9.792,31.667 ccw(c10.792,31.667) 10.792,30.667

## Silkscreen, mask and mechanical layers (free items; w line width, h text height)
Bottom Overlay:
  text "+" at 105.691,41.356 h1.2
  text "SCL" at 36.222,34.517 h1 r180
  text "SD" at 36.222,32.485 h1 r180
  text "VOLED" at 36.222,30.326 h1 r180
  text "GND" at 36.222,28.167 h1 r180
Mechanical 1:
  circle w0.013: c98.242,13.817 r2.45
  circle w0.013: c79.992,43.342 r2.45
  circle w0.013: c62.992,43.342 r2.45
  circle w0.013: c45.992,43.342 r2.45
Board Outline:
  circle w0.013: c62.992,43.342 r1.3
  circle w0.013: c79.992,43.342 r1.3
  circle w0.013: c45.992,43.342 r1.3
  circle w0.013: c98.242,13.817 r1.3
  pour cut-out: 57.992,36.152 71.992,36.152 ccw(c71.992,37.652) 71.992,39.152 57.992,39.152 ccw(c57.992,37.652)
  lines w0.013: 9.792,31.667 ccw(c10.792,31.667) 10.792,30.667 25.792,30.667 cw(c25.792,25.667) 30.792,25.667 30.792,10.817 ccw(c31.792,10.817) 31.792,9.817 106.992,9.817 ccw(c106.992,10.817) 107.992,10.817 107.992,23.492 cw(c109.242,23.492) 109.242,24.742 109.742,24.742 ccw(c109.742,25.992) 110.992,25.992 110.992,35.492 ccw(c109.742,35.492) 109.742,36.742 109.242,36.742 cw(c109.242,37.992) 107.992,37.992 107.992,50.667 ccw(c106.992,50.667) 106.992,51.667 10.792,51.667 ccw(c10.792,50.667) 9.792,50.667 9.792,31.667 ; 57.992,36.152 cw(c57.992,37.652) 57.992,39.152 71.992,39.152 cw(c71.992,37.652) 71.992,36.152 57.992,36.152

## Text inside footprints (layer, text, board x,y; h text height)
U1: Bottom Overlay "A" at 35.837,14.201 h1.1 r180; Bottom Overlay "SW" at 35.71,16.868 h1.1 r180; Bottom Overlay "GND" at 35.583,19.154 h1.1 r180; Bottom Overlay "SW" at 35.71,21.694 h1.1 r180; Bottom Overlay "B" at 35.583,24.107 h1.1 r180
U2: Mechanical 13 "ANTENNA" at 7.256,35.275 h1.78 r90
U3: Mechanical 13 "PCB EDGE" at 110.862,26.326 h0.41 r90